# EAGLE board control_board_v3 (EAGLE 8.2.1)
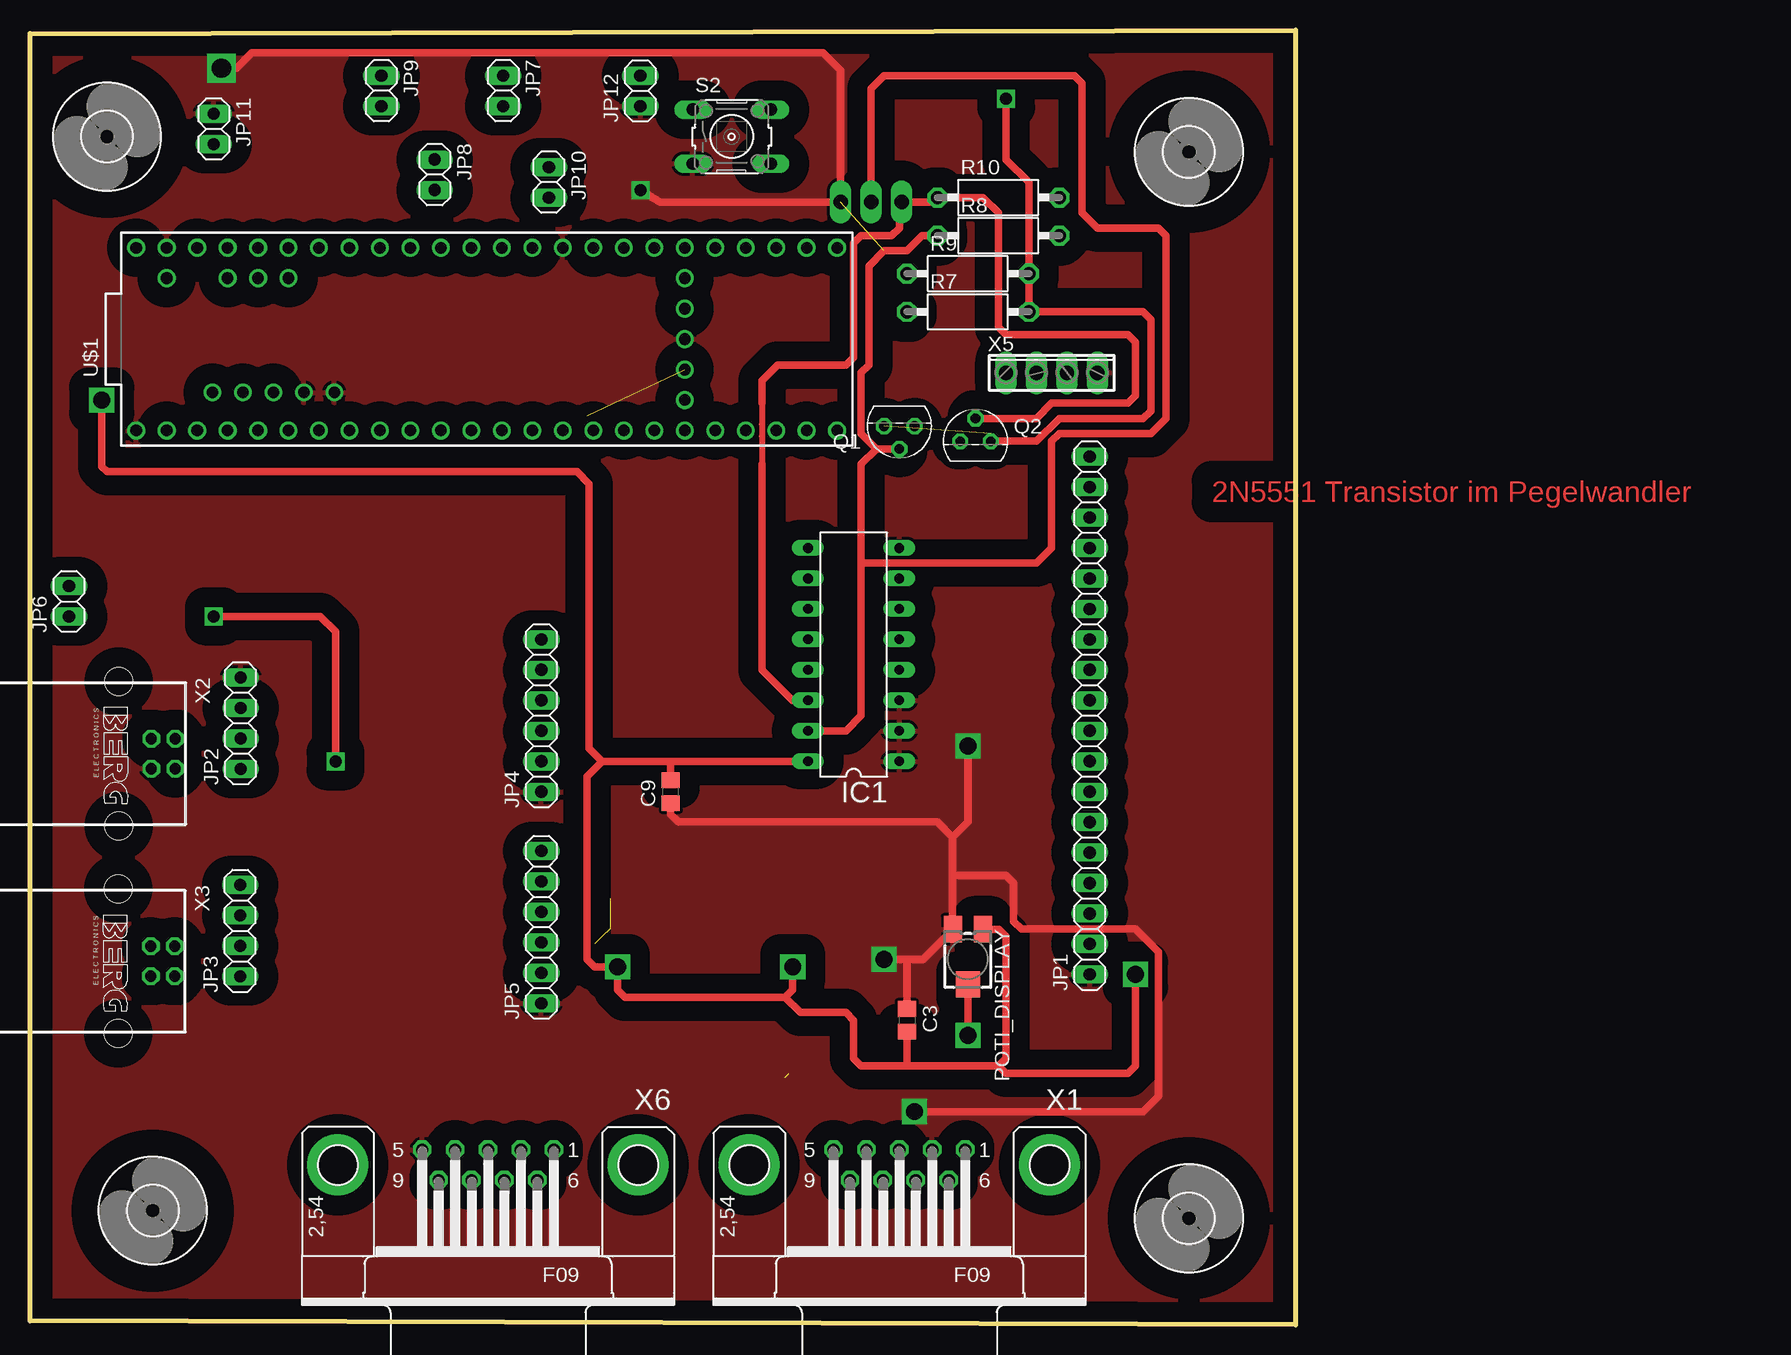
[diagram p0: board, top side]
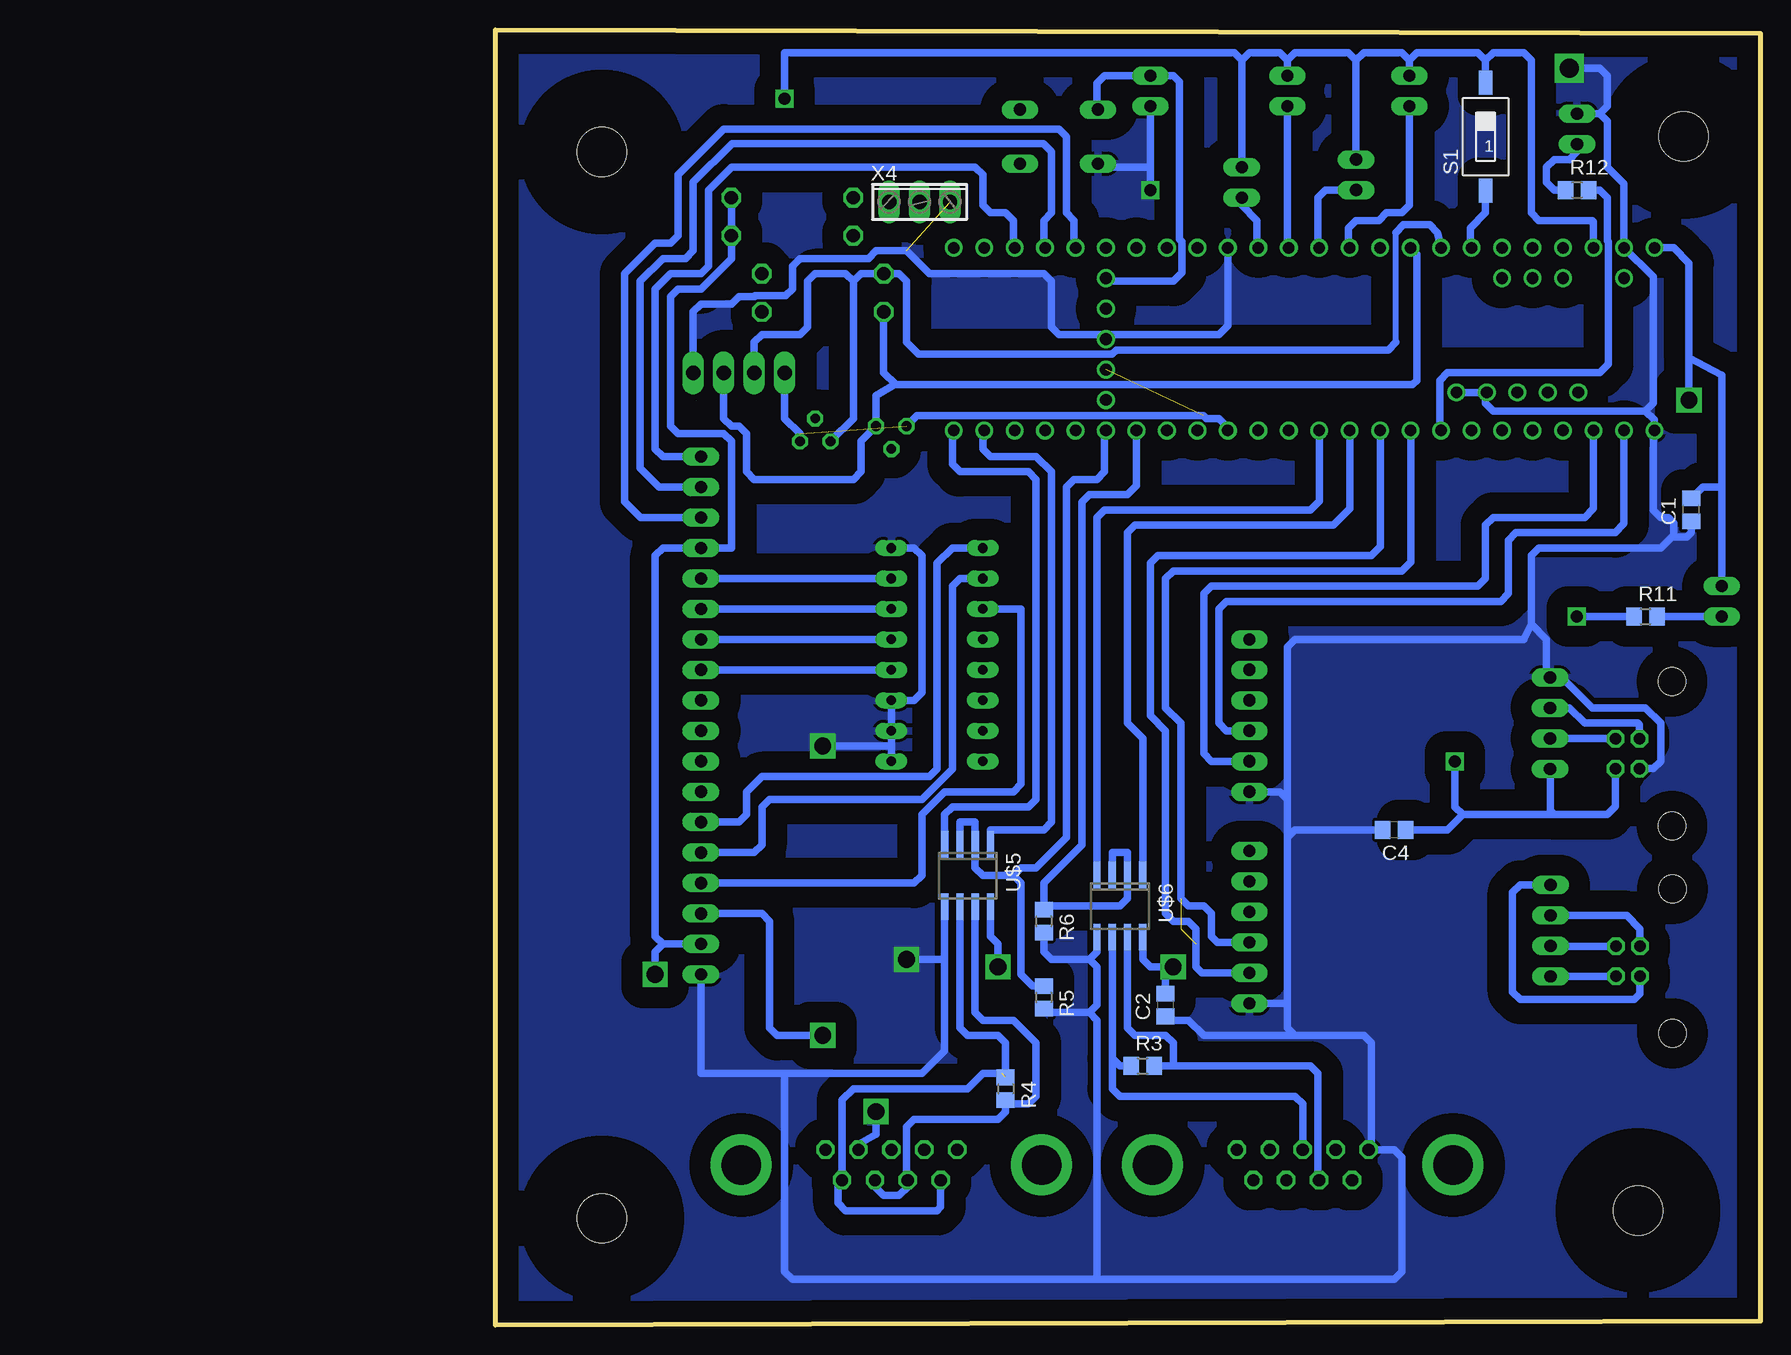
[diagram p1: board, bottom side, seen from below]

Size 105.48 x 107.95 mm. Coordinates in mm from the lower left corner, seen from the top.
Outline: 0,107.65 105.48,107.95 105.48,0 0,0.33 0,107.65
Copper layers (1*16): Top 0.035mm / dielectric 1.5mm / Bottom 0.035mm
Design rules "default *": minimum track width 10mil, minimum drill 24mil, track to track 8mil, track to pad 8mil, pad to pad 8mil, via to via 8mil, smd to smd 8mil, copper to edge 40mil, drill to drill 8mil, minimum pad ring 10mil, minimum via ring 8mil, stop-mask expansion 4mil, vias tented up to drill 0mil, thermal gap 10mil

## Footprints (pad centres in the part's own frame; a part is rotated, then mirrored left to right if it is on the bottom)
C0805 = smd 1.3 x 1.5: 1 -0.95,0; 2 0.95,0
4,1 = hole 4.1: 0,0
DIL16 = drill 0.813 long: 1 -8.89,-3.81; 2 -6.35,-3.81; 3 -3.81,-3.81; 4 -1.27,-3.81; 5 1.27,-3.81; 6 3.81,-3.81; 7 6.35,-3.81; 8 8.89,-3.81; 9 8.89,3.81; 10 6.35,3.81; 11 3.81,3.81; 12 1.27,3.81; 13 -1.27,3.81; 14 -3.81,3.81; 15 -6.35,3.81; 16 -8.89,3.81
1X18 = drill 1.016 long: 1 -21.59,0; 2 -19.05,0; 3 -16.51,0; 4 -13.97,0; 5 -11.43,0; 6 -8.89,0; 7 -6.35,0; 8 -3.81,0; 9 -1.27,0; 10 1.27,0; 11 3.81,0; 12 6.35,0; 13 8.89,0; 14 11.43,0; 15 13.97,0; 16 16.51,0; 17 19.05,0; 18 21.59,0
1X04 = drill 1.016 long: 1 -3.81,0; 2 -1.27,0; 3 1.27,0; 4 3.81,0
1X06 = drill 1.016 long: 1 -6.35,0; 2 -3.81,0; 3 -1.27,0; 4 1.27,0; 5 3.81,0; 6 6.35,0
1X02 = drill 1.016 long: 1 -1.27,0; 2 1.27,0
RTRIM3374 = smd 1.5 x 2.2: 1 -1.25,-2.5; 3 1.25,-2.5 | smd 1.98 x 2.17: 2 0,2.1
TO92 = drill 0.813 octagon: 1 1.27,0; 2 0,1.905; 3 -1.27,0
R0805 = smd 1.3 x 1.5: 1 -0.95,0; 2 0.95,0
VMTA55 = drill 1.1 octagon: 1 -5.08,0; 2 5.08,0
SMS-001 = smd 1.092 x 2.007: 1 0,-4.496; 2 0,4.496
B3F-10XX = drill 1.016 long: 1 -3.251,2.261; 2 3.251,2.261; 3 -3.251,-2.261; 4 3.251,-2.261
TEENSY_3.6_ALL_PINS = drill 0.965: 0 -7.62,25.4; 1 -7.62,22.86; 2 -7.62,20.32; 3 -7.62,17.78; 3.3V 7.62,22.86; 3.3V3 -7.62,-7.62; 3.3V4 -2.54,-17.78; 4 -7.62,15.24; 5 -7.62,12.7; 6 -7.62,10.16; 7 -7.62,7.62; 8 -7.62,5.08; 9 -7.62,2.54; 10 -7.62,0; 11 -7.62,-2.54; 12 -7.62,-5.08; 13 7.62,-5.08; 14/A0 7.62,-2.54; 15/A1 7.62,0; 16/A2 7.62,2.54; 17/A3 7.62,5.08; 18/A4 7.62,7.62; 19/A5 7.62,10.16; 20/A6 7.62,12.7; 21/A7 7.62,15.24; 22/A8 7.62,17.78; 23/A9 7.62,20.32; 24 -7.62,-10.16; 25 -7.62,-12.7; 26 -7.62,-15.24; 27 -7.62,-17.78; 28 -7.62,-20.32; 29 -7.62,-22.86; 30 -7.62,-25.4; 31/A12 -7.62,-27.94; 32/A13 -7.62,-30.48; 33/A14 7.62,-30.48; 34/A15 7.62,-27.94; 35/A16 7.62,-25.4; 36/A17 7.62,-22.86; 37/A18 7.62,-20.32; 38/A19 7.62,-17.78; 39/A20 7.62,-15.24; A10 5.08,17.78; A11 5.08,15.24; A21 7.62,-12.7; A22 7.62,-10.16; AGND 7.62,25.4; AREF 5.08,20.32; D+ -4.445,16.51; D- -4.445,19.05; GND -7.62,27.94; GND1 7.62,-7.62; GND3 -4.445,13.97; GND4 -4.445,11.43; GND6 0,-17.78; PGM 2.54,-17.78; RESET 5.08,-17.78; VBAT -5.08,-17.78; VIN 7.62,27.94; VUSB 5.08,25.4; VUSB1 -4.445,21.59
SO08 = smd 0.6 x 2.2: A 0.635,2.6; B -0.635,2.6; DE 0.635,-2.6; DI 1.905,-2.6; GND 1.905,2.6; RO -1.905,-2.6; VCC -1.905,2.6; ~RE -0.635,-2.6
F09HP = drill 1.016 octagon: 1 -5.486,-1.27; 2 -2.743,-1.27; 3 0,-1.27; 4 2.743,-1.27; 5 5.486,-1.27; 6 -4.115,1.27; 7 -1.372,1.27; 8 1.372,1.27; 9 4.115,1.27 | drill 3.302 pad 5.08: G1 -12.522,0; G2 12.522,0
PN61729 = drill 0.95 octagon: 1 1.25,4.71; 2 -1.25,4.71; 3 -1.25,2.71; 4 1.25,2.71 | hole 2.3: -6.02,0; 6.02,0
3POL254 = drill 1.2 long: 1 -2.54,0; 2 0,0; 3 2.54,0
4POL254 = drill 1.2 long: 1 -3.81,0; 2 -1.27,0; 3 1.27,0; 4 3.81,0

## Placement (x,y rotation side)
C1  0.1uF  [C0805]  5.79,67.94 90 bottom
C2  [C0805]  49.61,26.67 90 bottom
C3  [C0805]  73.1,25.4 270 top
C4  1uF  [C0805]  30.56,41.28 180 bottom
C9  0.1uF  [C0805]  53.42,44.45 90 top
H1  MOUNT-HOLE4.1  [4,1]  6.42,99.06 0 top
H2  MOUNT-HOLE4.1  [4,1]  96.59,97.79 0 top
H3  MOUNT-HOLE4.1  [4,1]  10.23,9.52 0 top
H4  MOUNT-HOLE4.1  [4,1]  96.59,8.89 0 top
IC1  PCF8574AN (bauteil ist P)  [DIL16]  68.66,55.88 90 top
JP1  [1X18]  88.34,50.8 90 top
JP2  [1X04]  17.56,50.16 90 top
JP3  [1X04]  17.52,32.86 90 top
JP4  [1X06]  42.62,50.8 90 top
JP5  [1X06]  42.62,33.16 90 top
JP6  [1X02]  3.25,60.33 90 top
JP7  [1X02]  39.45,102.87 270 top
JP8  [1X02]  33.73,95.89 270 top
JP9  [1X02]  29.29,102.87 270 top
JP10  [1X02]  43.26,95.25 270 top
JP11  [1X02]  15.31,99.69 270 top
JP12  [1X02]  50.88,102.87 90 top
POTI_DISPLAY  10k  [RTRIM3374]  78.18,30.48 180 top
Q1  BSS295  [TO92]  72.47,74.93 180 top
Q2  BSS295  [TO92]  78.81,73.66 0 top
R3  120  [R0805]  51.51,21.59 0 bottom
R4  120  [R0805]  62.94,19.69 270 bottom
R5  50  [R0805]  59.77,27.3 270 bottom
R6  50  [R0805]  59.77,33.66 270 bottom
R7  10k  [VMTA55]  78.18,84.45 0 top
R8  10k  [VMTA55]  80.72,90.81 0 top
R9  10k  [VMTA55]  78.18,87.63 0 top
R10  10k  [VMTA55]  80.72,93.98 0 top
R11  300  [R0805]  9.6,59.05 0 bottom
R12  300  [R0805]  15.31,94.62 0 bottom
S1  SWS001  [SMS-001]  22.94,99.06 0 bottom
S2  [B3F-10XX]  58.5,99.06 0 top
U$1  TEENSY_3.6_ALL_PINS  [TEENSY_3.6_ALL_PINS]  36.8,82.18 90 top
U$5  MAX14775EASA+  [SO08]  66.12,37.47 180 bottom
U$6  MAX14775EASA+  [SO08]  53.42,34.92 180 bottom
X1  [F09HP]  72.47,13.34 180 top
X2  [PN61729]  7.4,47.62 270 top
X3  [PN61729]  7.36,30.32 270 top
X4  [3POL254]  70.12,93.61 0 bottom
X5  [4POL254]  85.17,79.38 0 top
X6  [F09HP]  38.17,13.34 180 top

## Library data of the parts
C1-C4 C9 POTI_DISPLAY R3-R12 = rcl
H1-H4 = holes
IC1 = micro-philips; MPN: PCF8574PN; OC_FARNELL: 204020; OC_NEWARK: 11N8515
JP1-JP12 = pinhead
Q1 Q2 = transistor-fet
S1 = smd-special
S2 = switch-omron; MPN: B3F-1000; OC_FARNELL: 176432; OC_NEWARK: 36M3542
U$1 = Teensy_3_and_LC_Series_Boards_v1.4
U$5 U$6 = own_MAX14775EASA+
X1 X6 = con-subd; OC_FARNELL: unknown; OC_NEWARK: unknown
X2 X3 = con-berg; OC_FARNELL: unknown; OC_NEWARK: unknown
X4 X5 = con-phoenix-254; OC_FARNELL: unknown; OC_NEWARK: unknown

## Nets
3V3: JP7.1 JP8.1 JP9.1 JP10.1 Q1.1 Q2.1 R7.2 R9.2 S1.2 U$1.3.3V U$1.3.3V3 U$1.3.3V4 X5.1
5V: C1.2 C2.2 C3.2 C9.2 IC1.16 JP1.2 JP1.15 JP6.2 POTI_DISPLAY.1 R8.2 R10.2 U$1.VIN U$5.VCC U$6.VCC
5V_USB1: C4.1 JP2.1 R11.1 X2.1
5V_USB2: JP3.1 X3.1
A_BüRKERT: R4.1 U$5.A X1.6 X1.9
A_MKS: R3.1 U$6.A X6.3
ABGESCHLOSSEN_LED: JP10.2 U$1.13
AREF: U$1.AREF
B_BüRKERT: R4.2 U$5.B X1.7 X1.8
B_MKS: R3.2 U$6.B X6.8
BüRKERT_ENABLE: R5.1 U$1.27 U$5.DE U$5.~RE
D+1: JP2.3 X2.3
D+2: JP3.3 X3.3
D-1: JP2.2 X2.2
D-2: JP3.2 X3.2
DEBUG_LED: R12.2 U$1.6
DEBUG_SWITCH: S1.1 U$1.20/A6
GND: C1.1 C2.1 C3.1 C4.2 C9.1 IC1.1 IC1.2 IC1.3 IC1.8 JP1.1 JP2.4 JP4.1 JP5.1 JP11.1 JP12.1 POTI_DISPLAY.3 R5.2 R6.2 S2.3 U$1.AGND U$1.GND U$1.GND1 U$1.GND3 U$1.GND4 U$1.GND6 U$5.GND U$6.GND X1.2 X2.4 X4.3 X5.4 X6.5
GND_USB2: JP3.4 X3.4
HOCH_TASTER: JP7.2 U$1.14/A0
I/O_0: IC1.4 JP1.11
I/O_1: IC1.5 JP1.12
I/O_2: IC1.6 JP1.13
I/O_3: IC1.7 JP1.14
I/O_4: IC1.9 JP1.6
I/O_5: IC1.10 JP1.5
I/O_6: IC1.11 JP1.4
I/O_7: IC1.12
LED_MESSUNG: U$1.3
MKS_ENABLE: R6.1 U$1.26 U$6.DE U$6.~RE
N$1: JP6.1 R11.2
N$2: JP11.2 R12.1
OK_TASTER: JP9.2 U$1.16/A2
POTI: JP1.3 POTI_DISPLAY.2
PWM_1: JP1.18 U$1.35/A16
PWM_2: JP1.17 U$1.36/A17
PWM_3: JP1.16 U$1.37/A18
RESET: JP12.2 S2.1 U$1.RESET
RUNTER_TASTER: JP8.2 U$1.15/A1
RX1: JP4.3 U$1.0
RX2: U$1.9 U$6.RO
RX3: JP5.3 U$1.7
RX4: U$1.31/A12 U$5.RO
SCL0: Q2.3 R9.1 U$1.19/A5 X5.2
SCL0_5V: IC1.14 Q2.2 R10.1 X4.1
SDA0: Q1.3 R7.1 U$1.18/A4 X5.3
SDA0_5V: IC1.15 Q1.2 R8.1 X4.2
TX1: JP4.2 U$1.1
TX2: U$1.10 U$6.DI
TX3: JP5.2 U$1.8
TX4: U$1.32/A13 U$5.DI
VBAT: U$1.VBAT
VUSB: U$1.VUSB
VUSB1: U$1.VUSB1

## Tracks (layer width: path | path; a pad name or v marks a point on that pad's centre or on a via)
3V3  (via drill 1)  (2 unrouted)
  Top 0.61: Q2.1 83.9,73.66 85.8,75.56 92.78,75.56 93.42,76.2 93.42,83.82 92.78,84.45 R7.2 R9.2 83.26,95.25 81.36,97.16 v81.36,102.23
  Bottom 0.61: U$1.3.3V3 44.42,74.82 45.16,75.56 46.2,75.56 46.44,75.81 70.32,75.81 Q1.1 | 14.05,89.91 U$1.3.3V 13.94,91.97 14.05,92.08 18.49,92.08 19.12,92.71 19.12,105.41 19.76,106.05 22.3,106.05 22.94,105.41 | 29.29,105.41 28.65,106.05 23.57,106.05 22.94,105.41 | 29.29,105.41 JP9.1 | 29.29,105.41 29.92,106.05 33.09,106.05 33.73,105.41 | 33.73,105.41 JP8.1 | 39.45,105.41 38.81,106.05 34.37,106.05 33.73,105.41 | 39.45,105.41 JP7.1 | 39.45,105.41 40.08,106.05 42.62,106.05 43.26,105.41 | 43.26,105.41 JP10.1 | 43.26,105.41 43.89,106.05 81.36,106.05 v81.36,102.23 | Q2.1 80.09,74.3 81.36,75.56 X5.1 | 22.94,105.41 S1.2
5V  (via drill 1.4)
  Top 0.61: v63.58,29.84 63.58,27.94 62.94,27.3 | 62.94,27.3 49.61,27.3 48.97,27.94 v48.97,29.84 47.06,29.84 46.43,30.48 46.43,45.72 47.7,46.99 | POTI_DISPLAY.1 80.76,32.98 81.36,32.38 81.36,22.23 80.72,21.59 | 73.1,21.59 80.72,21.59 | 73.1,21.59 69.29,21.59 68.66,22.23 68.66,25.4 68.02,26.04 64.21,26.04 62.94,27.3 | 53.42,46.99 47.7,46.99 | 53.42,46.99 IC1.16 | 80.72,21.59 81.36,20.95 91.52,20.95 92.15,21.59 v92.15,29.21 | C9.2 53.42,46.99 | 47.7,46.99 46.62,48.07 46.62,70.11 45.62,71.12 6.42,71.12 5.98,71.56 v5.98,77.1 | C3.2 73.1,21.59
  Bottom 0.61: U$6.VCC 51.51,30.48 50.88,29.84 49.61,29.84 | U$5.VCC 64.21,32.38 63.58,31.75 v63.58,29.84 | v92.15,29.21 92.15,31.12 91.52,31.75 | 91.52,31.75 JP1.2 | 91.52,31.75 92.15,32.38 92.15,64.14 91.52,64.77 JP1.15 85.8,64.77 85.8,73.66 86.44,74.3 90.25,74.3 90.88,74.93 90.88,85.72 90.25,86.36 88.34,86.36 85.8,88.9 R8.2 R10.2 | 5.98,80.64 v5.98,77.1 | 5.98,80.64 5.98,88.53 7.25,89.8 U$1.VIN | JP6.2 3.25,69.85 | 3.25,69.85 3.25,79.19 5.98,80.64 | 3.25,69.85 4.84,69.85 C1.2 | 49.61,29.84 v48.97,29.84 | C2.2 49.61,29.84
5V_USB1  (via drill 1)
  Top 0.61: v25.48,46.99 25.48,57.78 24.2,59.05 v15.31,59.05
  Bottom 0.61: 17.22,42.55 12.78,42.55 12.11,43.22 X2.1 | 17.22,42.55 24.84,42.55 | 24.84,42.55 25.48,43.18 v25.48,46.99 | 17.54,46.38 JP2.1 17.56,42.88 17.22,42.55 | R11.1 v15.31,59.05 | 24.84,42.55 26.11,41.28 C4.1
5V_USB2
  Bottom 0.61: X3.1 17.5,29.07 JP3.1
A_BüRKERT  (1 unrouted)
  Bottom 0.61: X1.9 68.35,9.83 68.66,9.52 76.28,9.52 76.91,10.16 76.91,11.73 X1.6 76.58,18.74 75.64,19.69 66.12,19.69 64.84,20.95 63.26,20.95 | R4.1 62.94,23.49 63.58,24.13 66.12,24.13 66.75,24.77 U$5.A
A_MKS
  Bottom 0.61: U$6.A 54.05,22.23 | R3.1 53.42,21.59 54.05,22.23 | 54.05,22.23 54.05,19.69 53.42,19.05 38.81,19.05 38.17,18.41 X6.3
ABGESCHLOSSEN_LED
  Bottom 0.61: JP10.2 43.26,93.34 41.98,92.08 41.98,89.91 U$1.13
B_BüRKERT
  Bottom 0.61: X1.7 73.74,11.96 73.74,11.43 73.1,10.8 71.83,10.8 71.09,11.53 X1.8 71.2,12.17 71.2,16.51 70.56,17.15 63.58,17.15 62.94,17.78 R4.2 62.62,18.41 61.04,18.41 60.4,19.05 60.4,23.49 62.31,25.4 64.84,25.4 65.48,26.04 U$5.B
B_MKS
  Bottom 0.61: U$6.B 52.78,24.77 52.15,24.13 49.61,24.13 48.97,23.49 48.97,21.59 | 48.97,21.59 R3.2 | X6.8 36.91,12.17 36.91,20.95 37.54,21.59 48.97,21.59
BüRKERT_ENABLE
  Bottom 0.61: U$5.DE 66.75,41.91 65.48,41.91 U$5.~RE 65.48,38.1 64.84,37.47 62.31,37.47 | R5.1 60.72,28.26 61.67,29.21 61.67,36.83 62.31,37.47 | 62.31,37.47 61.67,38.1 60.4,38.1 57.86,40.64 57.86,69.85 57.23,70.48 55.32,70.48 54.69,71.12 54.69,74.37 U$1.27
D+1
  Bottom 0.61: X2.3 10.11,50.03 10.23,50.16 14.68,50.16 15.95,51.44 JP2.3
D+2
  Bottom 0.61: X3.3 10.06,33.03 11.17,34.13 JP3.3
D-1
  Bottom 0.61: X2.2 17.54,48.88 JP2.2
D-2
  Bottom 0.61: X3.2 17.5,31.57 JP3.2
DEBUG_LED
  Bottom 0.61: U$1.6 26.75,74.67 26.75,78.74 26.11,79.38 13.41,79.38 12.69,80.09 12.69,90.32 12.78,90.4 12.78,93.98 13.41,94.62 R12.2
DEBUG_SWITCH
  Bottom 0.61: S1.1 22.94,92.71 24.2,91.44 24.2,89.91 U$1.20/A6
GND  (via drill 1, 1.4, 1.6)  (1 unrouted)
  Top 0.61: C9.1 53.42,42.55 54.05,41.91 75.64,41.91 76.91,40.64 | 76.91,37.47 76.91,40.64 | 76.91,37.47 76.91,33 POTI_DISPLAY.3 74.43,30.48 73.1,30.48 | 73.1,30.48 v71.2,30.48 | v73.74,17.78 92.78,17.78 94.06,19.05 94.06,31.12 92.15,33.02 82.62,33.02 81.99,33.66 81.99,36.83 81.36,37.47 76.91,37.47 | 76.91,40.64 78.18,41.91 v78.18,48.26 | v50.88,94.62 52.52,93.61 X4.3 67.58,104.59 66.12,106.05 18.49,106.05 17.22,104.78 v15.95,104.78 | C3.1 73.1,30.48
  Bottom 0.61: 72.47,48.26 IC1.1 | 72.47,48.26 IC1.2 IC1.3 70.56,52.07 69.93,52.7 69.93,64.14 70.56,64.77 IC1.8 73.1,64.77 | U$6.GND 55.32,31.12 55.96,30.48 | 55.96,30.48 59.13,30.48 59.77,31.12 R6.2 | 19.12,58.42 19.12,64.14 18.49,64.77 8.33,64.77 7.43,65.67 7.06,65.67 | 19.12,58.42 19.76,57.15 38.81,57.15 39.45,56.52 39.45,43.81 | 55.96,30.48 55.32,29.84 55.32,26.67 55.96,26.04 | 55.96,26.04 59.45,26.04 R5.2 | 55.96,26.04 55.32,25.4 55.32,3.81 | 55.32,3.81 80.72,3.81 81.36,4.45 81.36,20.95 | 81.36,20.95 69.93,20.95 68.02,22.86 68.02,30.48 | 68.02,30.48 U$5.GND | 68.02,30.48 v71.2,30.48 | 55.32,3.81 30.56,3.81 29.92,4.45 29.92,13.97 30.56,14.61 X6.5 32.46,14.83 32.46,23.49 33.09,24.13 38.81,24.13 | U$1.GND4 U$1.GND3 22.94,77.62 22.94,76.84 22.3,76.2 9.6,76.2 | 81.36,20.95 88.34,20.95 JP1.1 | X1.2 75.21,15.04 73.74,15.88 v73.74,17.78 | v78.18,48.26 72.47,48.26 | 9.6,76.2 8.86,75.45 U$1.GND 8.97,74.45 8.97,67.94 8.33,67.31 7.7,67.31 7.25,66.86 7.25,65.86 7.06,65.67 | 19.12,58.42 17.86,57.15 17.86,54.28 JP2.4 16.59,53.98 14.05,51.44 9.6,51.44 8.33,50.16 8.33,46.99 8.95,46.38 X2.4 | 9.6,76.2 8.97,76.84 8.97,87.37 U$1.AGND 11.4,95.14 12.78,96.52 12.78,100.33 13.41,100.97 | 39.45,43.81 39.45,40.64 | 38.81,24.13 39.45,24.77 39.45,26.67 | U$1.GND1 44.42,83.3 45.16,82.55 54.21,82.55 U$1.GND6 54.95,82.55 58.5,82.55 59.13,83.19 59.13,87 59.77,87.63 69.29,87.63 71.2,89.53 73.74,89.53 74.37,88.9 80.09,88.9 80.72,88.27 80.72,86.36 81.29,85.79 83.81,85.79 83.88,85.72 85.17,85.72 85.8,85.09 88.34,85.09 88.98,84.45 X5.4 | v50.88,94.62 50.88,96.52 | 50.88,96.52 JP12.1 | 50.88,96.52 55.32,96.52 55.32,96.72 S2.3
  Bottom 0.61: 13.41,100.97 JP11.1 | 13.41,100.97 12.78,101.6 12.78,104.14 13.41,104.78 v15.95,104.78 | 7.06,65.67 6.16,65.67 5.79,66.04 C1.1 | 38.81,24.13 45.16,24.13 | 45.16,24.13 45.48,24.13 | C4.2 38.81,41.28 39.45,40.64 | 39.45,26.67 39.45,40.64 | JP4.1 40.08,44.45 39.45,43.81 | JP5.1 39.59,26.81 39.45,26.67 | 45.16,24.13 46.43,24.13 47.7,25.4 49.29,25.4 C2.1
  pour Bottom (isolate 1.778): 0,107.95 105.48,107.95 105.48,0 0,0.64
  pour Top (isolate 1.676): 0,107.95 105.48,107.95 105.48,0 0,0.64
GND_USB2
  Bottom 0.61: X3.4 10.06,27.61 10.53,27.15 20.06,27.15 20.69,27.78 20.69,36.04 20.06,36.67 JP3.4
HOCH_TASTER
  Bottom 0.61: JP7.2 39.45,89.91 U$1.14/A0
I/O_0
  Bottom 0.61: IC1.4 JP1.11
I/O_1
  Bottom 0.61: IC1.5 JP1.12
I/O_2
  Bottom 0.61: IC1.6 JP1.13
I/O_3
  Bottom 0.61: IC1.7 JP1.14
I/O_4
  Bottom 0.61: IC1.9 67.39,64.77 68.66,63.5 68.66,46.36 69.29,45.72 83.26,45.72 84.53,44.45 84.53,42.55 85.17,41.91 JP1.6
I/O_5
  Bottom 0.61: IC1.10 66.75,62.23 67.39,61.59 67.39,46.36 69.93,43.81 82.62,43.81 83.26,43.18 83.26,40.01 83.9,39.37 JP1.5
I/O_6
  Bottom 0.61: JP1.4 70.56,36.83 69.93,37.47 69.93,42.55 68.02,44.45 62.31,44.45 61.67,45.09 61.67,59.69 IC1.11
MKS_ENABLE
  Bottom 0.61: U$6.DE 54.05,39.37 52.78,39.37 U$6.~RE 52.78,35.56 53.42,34.92 59.45,34.92 R6.1 59.77,36.83 56.91,39.69 | 56.91,39.69 56.59,40.01 | U$1.26 52.04,69.96 52.78,69.22 55.96,69.22 56.59,68.58 56.59,40.01 | 56.59,40.01 56.91,39.69
N$1
  Bottom 0.61: JP6.1 R11.2
N$2
  Bottom 0.61: 16.59,94.94 R12.1 17.22,94.62 17.86,95.25 17.86,96.52 17.22,97.16 15.95,97.16 15.31,97.79 JP11.2
OK_TASTER
  Bottom 0.61: JP9.2 29.29,93.34 29.92,92.71 31.19,92.71 31.83,92.08 33.73,92.08 34.37,91.44 34.37,89.91 U$1.16/A2
POTI  (via drill 1.4)
  Top 0.61: v78.18,24.13 POTI_DISPLAY.2
  Bottom 0.61: v78.18,24.13 81.99,24.13 82.62,24.77 82.62,33.66 83.26,34.29 JP1.3
PWM_1
  Bottom 0.61: JP1.18 91.52,72.39 92.15,73.03 92.15,86.36 90.88,87.63 88.34,87.63 87.71,88.27 87.71,94.62 85.8,96.52 65.48,96.52 64.84,95.89 64.84,93.34 64.21,92.71 62.94,92.71 62.31,92.08 62.31,89.91 U$1.35/A16
PWM_2
  Bottom 0.61: JP1.17 91.83,69.85 93.42,71.44 93.42,87 91.52,88.9 89.61,88.9 88.98,89.53 88.98,95.25 85.76,98.46 59.8,98.46 59.13,97.79 59.13,92.71 59.77,92.08 59.77,89.91 U$1.36/A17
PWM_3
  Bottom 0.61: JP1.16 93.37,67.31 94.69,68.64 94.69,87.63 92.15,90.17 90.88,90.17 90.25,90.81 90.25,95.89 86.44,99.69 58.5,99.69 57.86,99.06 57.86,92.71 57.23,92.08 57.23,89.91 U$1.37/A18
RESET
  Bottom 0.61: U$1.RESET 54.31,87 48.97,87 48.25,87.72 48.25,90.32 48.46,90.53 48.46,103.63 48.97,104.14 JP12.2 54.69,104.14 55.32,103.5 55.32,101.4 S2.1
RUNTER_TASTER
  Bottom 0.61: JP8.2 36.27,94.62 36.91,93.98 36.91,89.91 U$1.15/A1
RX1
  Bottom 0.61: U$1.0 11.4,66.78 12.14,66.04 20.4,66.04 21.03,65.41 21.03,60.96 21.67,60.33 44.53,60.33 45.16,59.69 45.16,50.16 44.53,49.53 JP4.3
RX2
  Bottom 0.61: U$6.RO 51.51,48.89 52.78,50.16 52.78,64.14 | 52.78,64.14 52.78,64.77 | U$1.9 34.26,68.06 35.64,66.67 52.15,66.67 52.78,66.04 52.78,64.14
RX3  (3 unrouted)
  Bottom 0.61: U$1.7 29.17,63.61 29.92,62.87 48.97,62.87 49.61,62.23 49.61,51.44 48.34,50.16 48.34,35.56 47.7,34.92 46.43,34.92 45.8,34.29 45.8,32.38 45.3,31.89 JP5.3
RX4
  Bottom 0.61: U$5.RO 64.21,41.28 59.77,41.28 59.13,41.91 59.13,71.12 60.4,72.39 64.21,72.39 64.84,73.03 64.84,74.37 U$1.31/A12
SCL0
  Bottom 0.508: 30.41,81.92 30.41,91.07
  Bottom 0.61: U$1.19/A5 26.94,91.07 27.57,91.7 29.78,91.7 30.41,91.07 | 75.64,87 75,87.63 R9.1 71.83,87.63 71.2,87 71.2,81.92 70.22,80.94 54.06,80.94 53.72,81.28 31.05,81.28 30.41,81.92 | 75.64,87 75.64,75.56 Q2.3 | 75.64,87 76.28,87.63 78.81,87.63 79.45,87 79.45,83.19 80.09,82.55 83.26,82.55 83.9,81.92 X5.2
SCL0_5V
  Top 0.508: 61.04,76.84 61.04,75.09 61,75.05 61,74.07 61.04,74.03 61.04,71.75
  Top 0.61: IC1.14 63.58,52.07 61.04,54.61 61.04,71.75 | 61.04,76.84 61.04,78.74 62.31,80.01 68.02,80.01 68.66,80.64 68.66,90.17 69.29,90.81 71.83,90.81 72.47,91.44 72.47,93.42 X4.1 75.27,93.61 R10.1 79.45,93.98 80.72,92.71 80.72,83.19 81.36,82.55 91.52,82.55 92.15,81.92 92.15,77.47 91.52,76.84 85.17,76.84 83.9,75.56 Q2.2
SDA0
  Bottom 0.61: U$1.18/A4 28.65,89.28 28.65,78.74 29.02,78.37 72.09,78.37 | 72.09,78.37 72.2,78.37 73.74,77.47 Q1.3 75,73.66 75,71.12 75.64,70.48 83.9,70.48 84.53,71.12 84.53,74.3 85.17,74.93 85.8,74.93 86.44,75.56 X5.3 | 72.09,78.37 73.1,79.38 R7.1
SDA0_5V
  Top 0.61: IC1.15 68.02,49.53 69.29,50.8 69.29,63.5 | 69.29,63.5 69.29,71.75 70.56,73.03 | Q1.2 70.56,73.03 | 69.29,63.5 83.9,63.5 85.17,64.77 85.17,73.66 85.8,74.3 93.42,74.3 94.69,75.56 94.69,90.81 94.06,91.44 88.98,91.44 87.71,92.71 87.71,103.5 87.07,104.14 71.2,104.14 70.12,103.06 X4.2 | 70.56,73.03 69.29,74.3 69.29,79.38 69.93,80.01 69.93,88.27 71.2,89.53 73.1,89.53 74.37,90.81 R8.1
TX1
  Bottom 0.61: U$1.1 13.94,68.06 14.68,67.31 22.3,67.31 22.94,66.67 22.94,62.23 23.57,61.59 45.8,61.59 46.43,60.96 46.43,47.62 45.8,46.99 JP4.2
TX2
  Bottom 0.61: U$1.10 36.8,68.69 37.54,67.94 54.69,67.94 55.32,67.31 U$6.DI
TX3
  Bottom 0.61: U$1.8 31.72,64.88 32.46,64.14 50.24,64.14 50.88,63.5 50.88,50.8 49.61,49.53 49.61,34.29 48.97,33.66 47.7,33.66 47.06,33.02 47.06,29.84 46.57,29.35 JP5.2
TX4
  Bottom 0.61: U$5.DI 68.02,42.55 67.39,43.18 61.04,43.18 60.4,43.81 60.4,70.48 61.04,71.12 66.75,71.12 67.39,71.75 67.39,74.37 U$1.32/A13

## Text on the board
Top: 2N5551 Transistor im Pegelwandler